# Altium PCB main_old.PcbDoc (part 9 of 15)
Units mil, origin at the board's own origin, x right, y up, seen from the top; angles counter-clockwise.
Board outline 8394.55 x 5164.44 mil, 7 copper layers (Top Layer 1, Layer 2, Layer 3, Unused, Layer 4_pow, Layer 5_gnd, Bottom 6+gnd), stack 46.112 mil thick; 363 components, 409 nets, 1750 pads, 991 vias.
Unrouted connection lines stored in the file: 1.
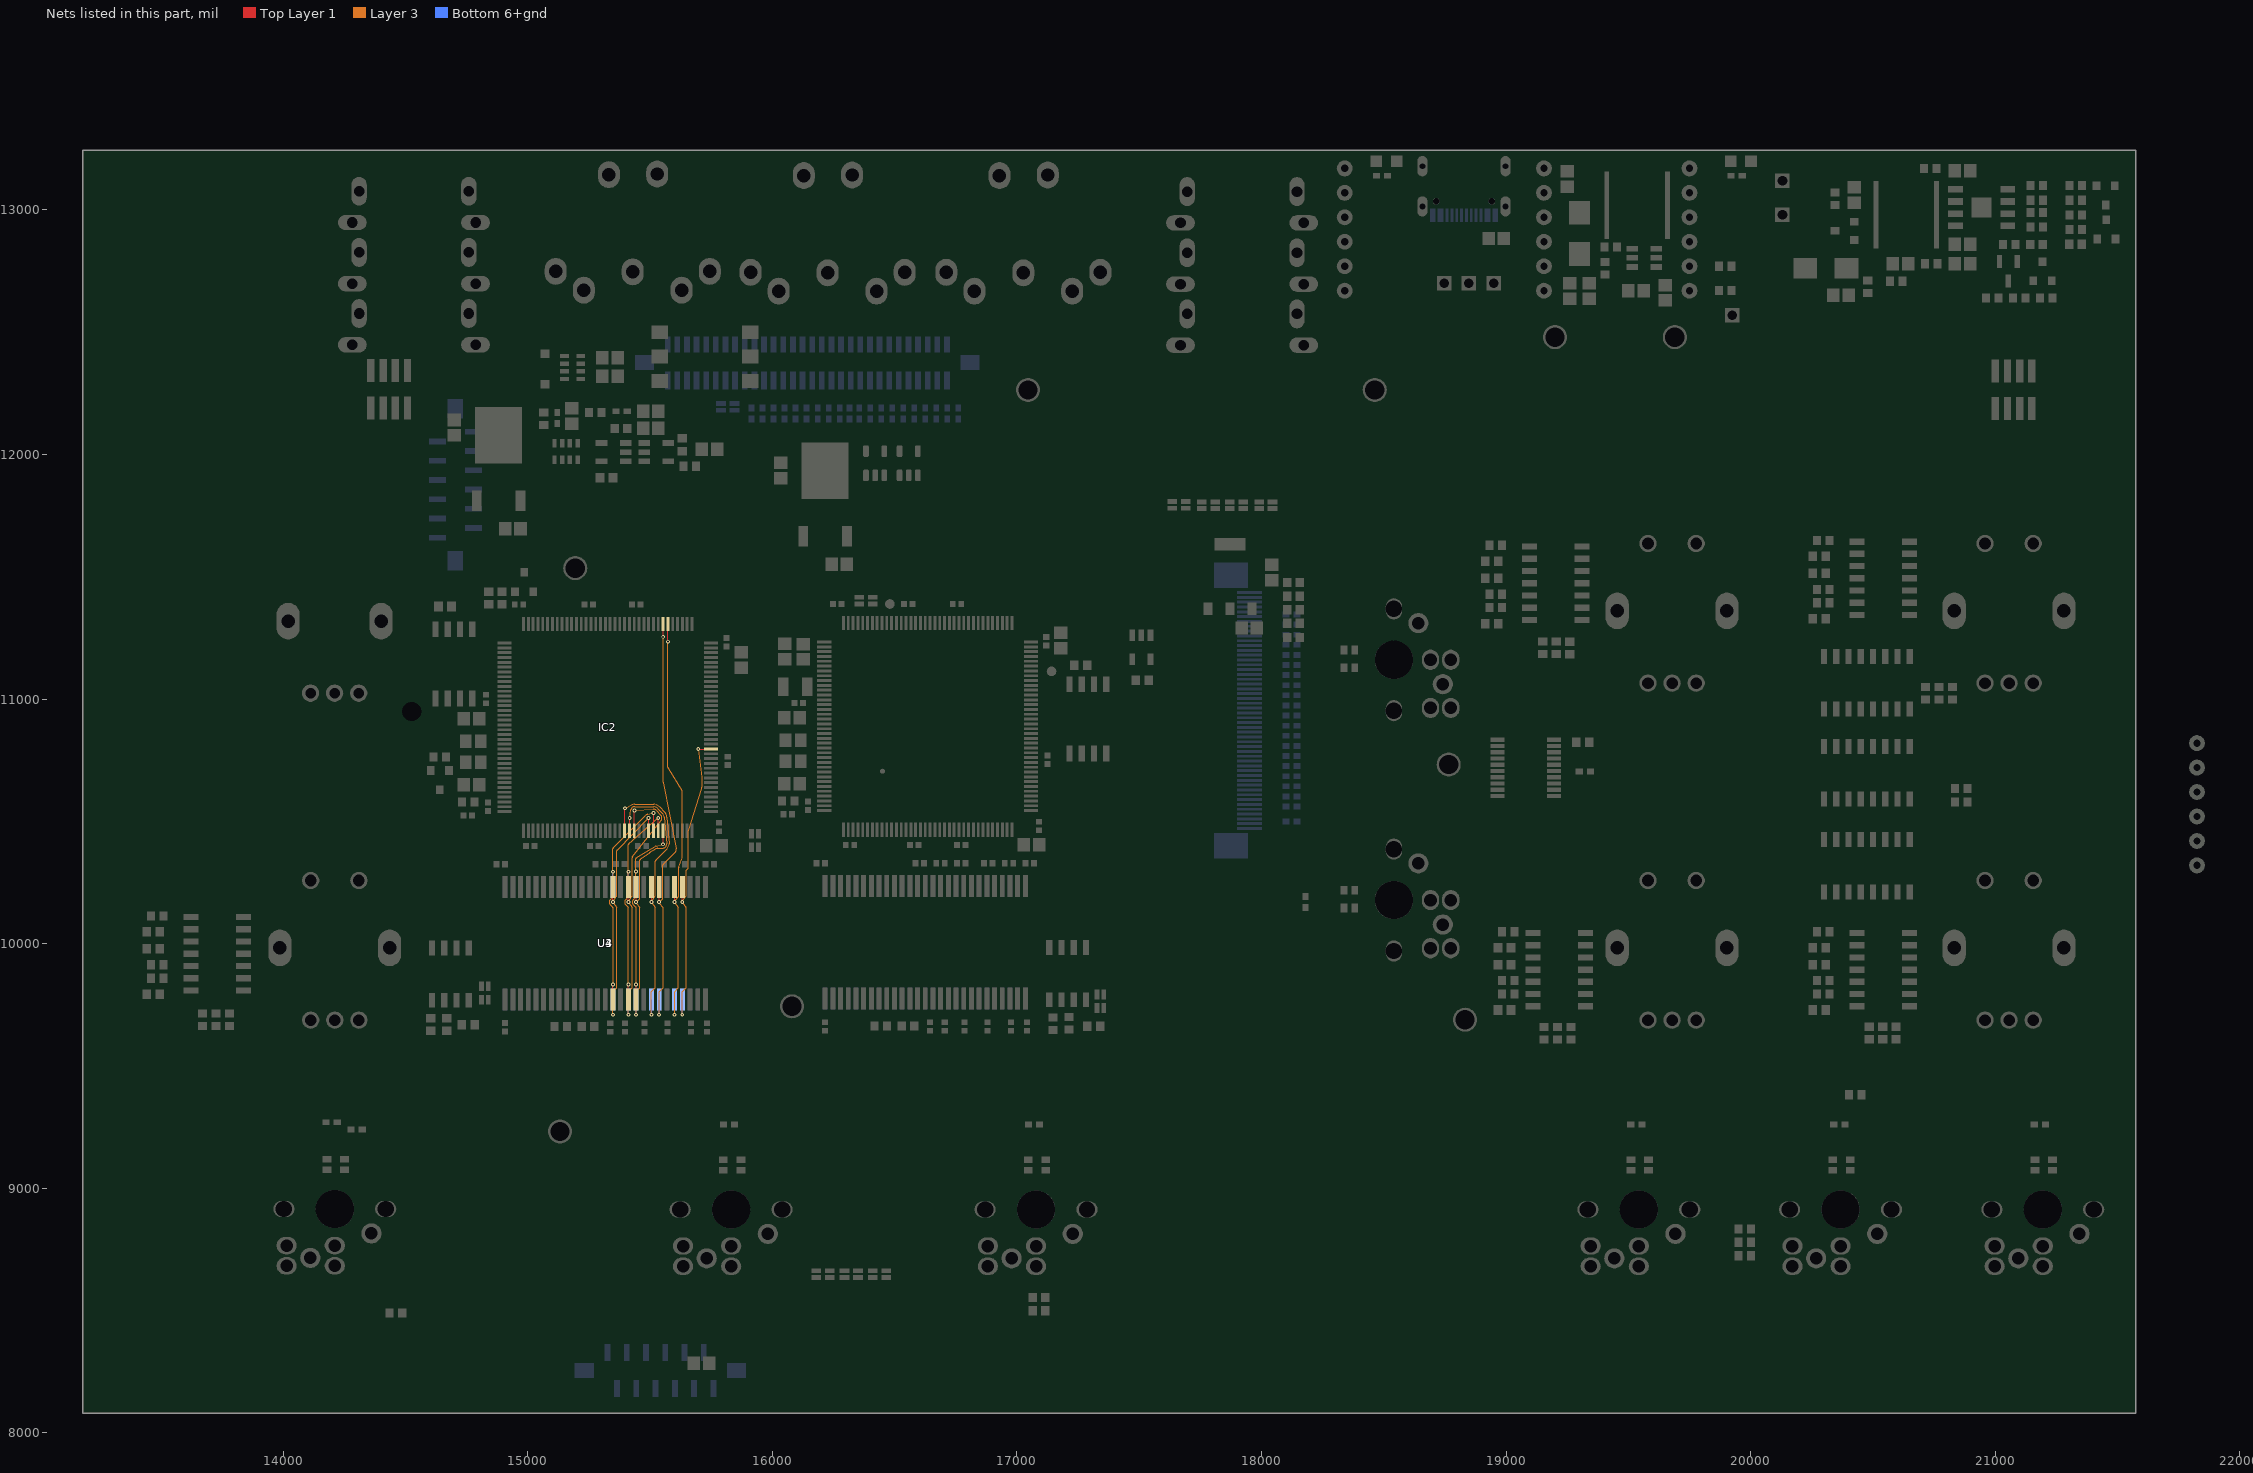
[diagram p12: the nets of this part, all layers, seen from the top]

## Via types
v1: diameter 15.75, hole 7.87, Top Layer 1 to Bottom 6+gnd, tented both sides, 923 vias
v2: diameter 27.56, hole 11.81, Top Layer 1 to Bottom 6+gnd, 45 vias
v3: diameter 23.62/23.62/23.62/23.62/23.62/23.62/23.62 (per signal layer), hole 12, Top Layer 1 to Bottom 6+gnd, tented top, 10 vias
v4: diameter 15.75, hole 7.87, Top Layer 1 to Bottom 6+gnd, 10 vias
v5: diameter 23.62/23.62/23.62/23.62/23.62/23.62/23.62 (per signal layer), hole 12, Top Layer 1 to Bottom 6+gnd, tented bottom, 3 vias

## Nets (pads, with @x,y where several pads share a name; then routed paths per layer and width w, separated by ;. In a path a pad name is that pad's centre, name@x,y a point inside that pad or via, vN(x,y) a via of type N, cw(c..) or ccw(c..) an arc to the next point about the centre after c; other vN are vias at no path point) (continued)
DD1: IC2.86 U3.4 U4.4 | length 1485.1
  Top Layer 1 w5: v1@15631.66,10170.19 U3.4@15631.66,10232.03 ; v1@15697.01,10795.89 IC2.86@15749.3,10795.89
  Layer 3 w5: v1(15631.42,9709.31) 15631.42,9803 15647.54,9819.12 15647.54,10145.78 ; v1(15631.42,10169.94) ccw(c15636.42,10169.94) 15632.47,10166.88 15646.49,10148.8 ; v1@15632.26,10172.73 ccw(c15636.42,10169.94) v1(15631.42,10169.94) ; 15647.54,10197.05 15647.54,10300.48 15655.24,10308.18 ; v1(15696.78,10795.65) 15710.27,10680.61 cw(c15695,10678.82) 15710.36,10679.49 15712.14,10638.84 cw(c15696.78,10638.17) 15711.42,10633.47 15656.96,10463.98 ccw(c15661.73,10462.47) 15656.73,10462.5 15656.67,10311.69 ; v1(15631.42,10169.94) cw(c15636.42,10169.94) v1@15632.26,10172.72 ; v1(15631.42,10169.94) cw(c15636.42,10169.94) v1@15632.26,10172.72 ; v1(15631.42,10169.94) cw(c15636.42,10169.94) v1@15632.26,10172.72 ; v1(15631.42,10169.94) cw(c15636.42,10169.94) v1@15632.26,10172.72 ; v1(15631.42,10169.94) cw(c15636.42,10169.94) v1@15632.26,10172.72 ; v1(15631.42,10169.94) cw(c15636.42,10169.94) v1@15632.26,10172.72 ; v1(15631.42,10169.94) cw(c15636.42,10169.94) v1@15632.26,10172.72 ; v1(15631.42,10169.94) cw(c15636.42,10169.94) v1@15632.26,10172.72 ; v1(15631.42,10169.94) cw(c15636.42,10169.94) v1@15632.26,10172.72 ; v1(15631.42,10169.94) cw(c15636.42,10169.94) v1@15632.26,10172.72 ; v1(15631.42,10169.94) cw(c15636.42,10169.94) v1@15632.26,10172.72 ; v1(15631.42,10169.94) cw(c15636.42,10169.94) v1@15632.26,10172.72 ; v1(15631.42,10169.94) cw(c15636.42,10169.94) v1@15632.26,10172.72 ; v1(15631.42,10169.94) cw(c15636.42,10169.94) v1@15632.26,10172.72 ; v1(15631.42,10169.94) cw(c15636.42,10169.94) v1@15632.26,10172.72 ; v1@15632.26,10172.72 15646.7,10194.31 ; 15646.49,10148.8 cw(c15642.54,10145.74) 15647.54,10145.83 ; 15646.49,10148.8 cw(c15642.54,10145.74) 15647.54,10145.83 ; 15646.49,10148.8 cw(c15642.54,10145.74) 15647.54,10145.83 ; 15646.49,10148.8 cw(c15642.54,10145.74) 15647.54,10145.83 ; 15646.49,10148.8 cw(c15642.54,10145.74) 15647.54,10145.83 ; 15646.49,10148.8 cw(c15642.54,10145.74) 15647.54,10145.83 ; 15646.49,10148.8 cw(c15642.54,10145.74) 15647.54,10145.83 ; 15646.49,10148.8 cw(c15642.54,10145.74) 15647.54,10145.83 ; 15646.49,10148.8 cw(c15642.54,10145.74) 15647.54,10145.83 ; 15646.49,10148.8 cw(c15642.54,10145.74) 15647.54,10145.83 ; 15646.49,10148.8 cw(c15642.54,10145.74) 15647.54,10145.83 ; 15646.49,10148.8 cw(c15642.54,10145.74) 15647.54,10145.83 ; 15646.49,10148.8 cw(c15642.54,10145.74) 15647.54,10145.83 ; 15646.49,10148.8 cw(c15642.54,10145.74) 15647.54,10145.83 ; 15646.49,10148.8 cw(c15642.54,10145.74) 15647.54,10145.83 ; 15646.49,10148.8 cw(c15642.54,10145.74) 15647.54,10145.83 ; 15646.7,10194.32 ccw(c15642.54,10197.09) 15647.54,10197 ; 15646.7,10194.32 ccw(c15642.54,10197.09) 15647.54,10197 ; 15646.7,10194.32 ccw(c15642.54,10197.09) 15647.54,10197 ; 15646.7,10194.32 ccw(c15642.54,10197.09) 15647.54,10197 ; 15646.7,10194.32 ccw(c15642.54,10197.09) 15647.54,10197 ; 15646.7,10194.31 ccw(c15642.54,10197.09) 15647.54,10197 ; 15646.7,10194.32 ccw(c15642.54,10197.09) 15647.54,10197 ; 15646.7,10194.32 ccw(c15642.54,10197.09) 15647.54,10197 ; 15646.7,10194.32 ccw(c15642.54,10197.09) 15647.54,10197 ; 15646.7,10194.32 ccw(c15642.54,10197.09) 15647.54,10197 ; 15646.7,10194.32 ccw(c15642.54,10197.09) 15647.54,10197 ; 15646.7,10194.32 ccw(c15642.54,10197.09) 15647.54,10197 ; 15646.7,10194.32 ccw(c15642.54,10197.09) 15647.54,10197 ; 15646.7,10194.32 ccw(c15642.54,10197.09) 15647.54,10197 ; 15646.7,10194.32 ccw(c15642.54,10197.09) 15647.54,10197 ; 15646.7,10194.32 ccw(c15642.54,10197.09) 15647.54,10197 ; 15655.26,10308.2 ccw(c15651.67,10311.69) 15656.67,10311.69 ; 15655.26,10308.2 ccw(c15651.67,10311.69) 15656.67,10311.69 ; 15655.26,10308.2 ccw(c15651.67,10311.69) 15656.67,10311.69 ; 15655.26,10308.2 ccw(c15651.67,10311.69) 15656.67,10311.69 ; 15655.26,10308.2 ccw(c15651.67,10311.69) 15656.67,10311.69 ; 15655.26,10308.2 ccw(c15651.67,10311.69) 15656.67,10311.69 ; 15655.26,10308.2 ccw(c15651.67,10311.69) 15656.67,10311.69 ; 15655.26,10308.2 ccw(c15651.67,10311.69) 15656.67,10311.69 ; 15655.26,10308.2 ccw(c15651.67,10311.69) 15656.67,10311.69 ; 15655.26,10308.2 ccw(c15651.67,10311.69) 15656.67,10311.69 ; 15655.26,10308.2 ccw(c15651.67,10311.69) 15656.67,10311.69 ; 15655.26,10308.2 ccw(c15651.67,10311.69) 15656.67,10311.69 ; 15655.26,10308.2 ccw(c15651.67,10311.69) 15656.67,10311.69 ; 15655.26,10308.2 ccw(c15651.67,10311.69) 15656.67,10311.69 ; 15655.26,10308.2 ccw(c15651.67,10311.69) 15656.67,10311.69 ; 15655.26,10308.2 ccw(c15651.67,10311.69) 15656.67,10311.69
  Bottom 6+gnd w5: v1@15631.66,9709.56 U4.4@15631.66,9771.4
DD2: IC2.114 U3.5 U4.5 | length 2000.5
  Top Layer 1 w5: v1@15572.76,11234.79 IC2.114@15572.82,11307.38 ; v1@15600.16,10170.19 U3.5@15600.16,10232.03
  Layer 3 w5: v1(15572.84,11234.71) 15572.84,10720.56 ccw(c15577.84,10720.56) 15573.6,10717.91 15629.72,10627.81 15629.76,10627.75 cw(c15616.7,10619.63) 15632.07,10619.63 15632.07,10354.63 ; v1(15599.92,9709.31) 15599.92,9803 15616.04,9819.12 15616.04,10145.78 ; v1(15599.92,10169.94) ccw(c15604.92,10169.94) 15600.97,10166.88 15614.99,10148.8 ; v1(15599.92,10169.94) cw(c15604.92,10169.94) 15601.01,10173.06 15615.45,10191.26 ; 15614.99,10148.8 cw(c15611.04,10145.74) 15616.04,10145.83 ; 15614.99,10148.8 cw(c15611.04,10145.74) 15616.04,10145.83 ; 15614.99,10148.8 cw(c15611.04,10145.74) 15616.04,10145.83 ; 15614.99,10148.8 cw(c15611.04,10145.74) 15616.04,10145.83 ; 15614.99,10148.8 cw(c15611.04,10145.74) 15616.04,10145.83 ; 15614.99,10148.8 cw(c15611.04,10145.74) 15616.04,10145.83 ; 15614.99,10148.8 cw(c15611.04,10145.74) 15616.04,10145.83 ; 15614.99,10148.8 cw(c15611.04,10145.74) 15616.04,10145.83 ; 15614.99,10148.8 cw(c15611.04,10145.74) 15616.04,10145.83 ; 15614.99,10148.8 cw(c15611.04,10145.74) 15616.04,10145.83 ; 15614.99,10148.8 cw(c15611.04,10145.74) 15616.04,10145.83 ; 15614.99,10148.8 cw(c15611.04,10145.74) 15616.04,10145.83 ; 15614.99,10148.8 cw(c15611.04,10145.74) 15616.04,10145.83 ; 15614.99,10148.8 cw(c15611.04,10145.74) 15616.04,10145.83 ; 15614.99,10148.8 cw(c15611.04,10145.74) 15616.04,10145.83 ; 15614.99,10148.8 cw(c15611.04,10145.74) 15616.04,10145.83 ; 15615.45,10191.26 ccw(c15611.53,10194.37) 15616.53,10194.28 ; 15615.45,10191.26 ccw(c15611.53,10194.37) 15616.53,10194.28 ; 15615.45,10191.26 ccw(c15611.53,10194.37) 15616.53,10194.28 ; 15615.45,10191.26 ccw(c15611.53,10194.37) 15616.53,10194.28 ; 15615.45,10191.26 ccw(c15611.53,10194.37) 15616.53,10194.28 ; 15615.45,10191.26 ccw(c15611.53,10194.37) 15616.53,10194.28 ; 15615.45,10191.26 ccw(c15611.53,10194.37) 15616.53,10194.28 ; 15615.45,10191.26 ccw(c15611.53,10194.37) 15616.53,10194.28 ; 15615.45,10191.26 ccw(c15611.53,10194.37) 15616.53,10194.28 ; 15615.45,10191.26 ccw(c15611.53,10194.37) 15616.53,10194.28 ; 15615.45,10191.26 ccw(c15611.53,10194.37) 15616.53,10194.28 ; 15615.45,10191.26 ccw(c15611.53,10194.37) 15616.53,10194.28 ; 15615.45,10191.26 ccw(c15611.53,10194.37) 15616.53,10194.28 ; 15615.45,10191.26 ccw(c15611.53,10194.37) 15616.53,10194.28 ; 15615.45,10191.26 ccw(c15611.53,10194.37) 15616.53,10194.28 ; 15615.45,10191.26 ccw(c15611.53,10194.37) 15616.53,10194.28 ; 15616.53,10194.32 15616.53,10309.9 cw(c15621.53,10309.91) 15616.89,10311.76 15630.26,10345.21 ; 15630.26,10345.21 ccw(c15606.7,10354.63) 15632.07,10354.63 ; 15630.26,10345.21 ccw(c15606.7,10354.63) 15632.07,10354.63 ; 15630.26,10345.21 ccw(c15606.7,10354.63) 15632.07,10354.63 ; 15630.26,10345.21 ccw(c15606.7,10354.63) 15632.07,10354.63 ; 15630.26,10345.21 ccw(c15606.7,10354.63) 15632.07,10354.63 ; 15630.26,10345.21 ccw(c15606.7,10354.63) 15632.07,10354.63 ; 15630.26,10345.21 ccw(c15606.7,10354.63) 15632.07,10354.63 ; 15630.26,10345.21 ccw(c15606.7,10354.63) 15632.07,10354.63 ; 15630.26,10345.21 ccw(c15606.7,10354.63) 15632.07,10354.63 ; 15630.26,10345.21 ccw(c15606.7,10354.63) 15632.07,10354.63 ; 15630.26,10345.21 ccw(c15606.7,10354.63) 15632.07,10354.63 ; 15630.26,10345.21 ccw(c15606.7,10354.63) 15632.07,10354.63 ; 15630.26,10345.21 ccw(c15606.7,10354.63) 15632.07,10354.63 ; 15630.26,10345.21 ccw(c15606.7,10354.63) 15632.07,10354.63 ; 15630.26,10345.21 ccw(c15606.7,10354.63) 15632.07,10354.63 ; 15630.26,10345.21 ccw(c15606.7,10354.63) 15632.07,10354.63
  Bottom 6+gnd w5: v1@15600.16,9709.56 U4.5@15600.16,9771.4
DD3: IC2.115 U3.7 U4.7 | length 1873.2
  Top Layer 1 w5: v1@15537.17,10170.19 U3.7@15537.17,10232.03 ; v1@15553.24,11254.94 IC2.115@15553.24,11307.23
  Layer 3 w5: v1(15536.93,9709.31) 15536.93,9803 15553.05,9819.12 15553.05,10145.78 ; 15552.55,10187.59 cw(c15547.55,10187.68) 15551.09,10184.15 v1(15536.93,10169.94) v1@15536.93,10167.87 ; 15552.55,10187.64 15552.55,10320.48 cw(c15557.55,10320.49) 15553.97,10323.97 15602.7,10373.89 ccw(c15591.7,10384.63) 15606.78,10387.61 15553.57,10658.97 cw(c15558.47,10659.93) 15553.47,10659.93 v1(15553.47,11254.71) ; v1@15536.93,10167.87 ccw(c15541.93,10167.88) v1@15538.17,10164.58 ; v1@15536.93,10167.87 ccw(c15541.93,10167.88) v1@15538.17,10164.58 ; v1@15536.93,10167.87 ccw(c15541.93,10167.88) v1@15538.17,10164.58 ; v1@15536.93,10167.87 ccw(c15541.93,10167.88) v1@15538.17,10164.58 ; v1@15536.93,10167.87 ccw(c15541.93,10167.88) v1@15538.17,10164.58 ; v1@15536.93,10167.87 ccw(c15541.93,10167.88) v1@15538.17,10164.58 ; v1@15536.93,10167.87 ccw(c15541.93,10167.88) v1@15538.17,10164.58 ; v1@15536.93,10167.87 ccw(c15541.93,10167.88) v1@15538.17,10164.58 ; v1@15536.93,10167.87 ccw(c15541.93,10167.88) v1@15538.17,10164.58 ; v1@15536.93,10167.87 ccw(c15541.93,10167.88) v1@15538.17,10164.58 ; v1@15536.93,10167.87 ccw(c15541.93,10167.88) v1@15538.17,10164.58 ; v1@15536.93,10167.87 ccw(c15541.93,10167.88) v1@15538.17,10164.58 ; v1@15536.93,10167.87 ccw(c15541.93,10167.88) v1@15538.17,10164.58 ; v1@15536.93,10167.87 ccw(c15541.93,10167.88) v1@15538.17,10164.58 ; v1@15536.93,10167.87 ccw(c15541.93,10167.88) v1@15538.17,10164.58 ; v1@15536.93,10167.87 ccw(c15541.93,10167.88) v1@15538.17,10164.58 ; v1@15538.17,10164.58 15551.81,10149.04 ; 15551.81,10149.04 cw(c15548.05,10145.74) 15553.05,10145.83 ; 15551.81,10149.04 cw(c15548.05,10145.74) 15553.05,10145.83 ; 15551.81,10149.04 cw(c15548.05,10145.74) 15553.05,10145.83 ; 15551.81,10149.04 cw(c15548.05,10145.74) 15553.05,10145.83 ; 15551.81,10149.04 cw(c15548.05,10145.74) 15553.05,10145.83 ; 15551.81,10149.04 cw(c15548.05,10145.74) 15553.05,10145.83 ; 15551.81,10149.04 cw(c15548.05,10145.74) 15553.05,10145.83 ; 15551.81,10149.04 cw(c15548.05,10145.74) 15553.05,10145.83 ; 15551.81,10149.04 cw(c15548.05,10145.74) 15553.05,10145.83 ; 15551.81,10149.04 cw(c15548.05,10145.74) 15553.05,10145.83 ; 15551.81,10149.04 cw(c15548.05,10145.74) 15553.05,10145.83 ; 15551.81,10149.04 cw(c15548.05,10145.74) 15553.05,10145.83 ; 15551.81,10149.04 cw(c15548.05,10145.74) 15553.05,10145.83 ; 15551.81,10149.04 cw(c15548.05,10145.74) 15553.05,10145.83 ; 15551.81,10149.04 cw(c15548.05,10145.74) 15553.05,10145.83 ; 15551.81,10149.04 cw(c15548.05,10145.74) 15553.05,10145.83
  Bottom 6+gnd w5: v1@15537.17,9709.56 U4.7@15537.17,9771.4
DD4: IC2.58 U3.8 U4.8 | length 2377.5
  Top Layer 1 w5: IC2.58@15395.76,10461.71 15396.15,10462.11 15396.15,10552.4 v1(15397.57,10553.82) ; v1@15505.68,10170.19 U3.8@15505.68,10232.03
  Layer 3 w5: v1(15397.57,10553.82) 15425.61,10567.45 ; v1(15505.43,9709.31) 15505.43,9803 15521.55,9819.12 15521.55,10145.78 ; 15521.8,10198.16 15521.8,10337.31 ; 15425.61,10567.45 cw(c15436.7,10544.63) 15436.78,10570 ; 15425.61,10567.45 cw(c15436.7,10544.63) 15436.78,10570 ; 15425.61,10567.45 cw(c15436.7,10544.63) 15436.78,10570 ; 15425.61,10567.45 cw(c15436.7,10544.63) 15436.78,10570 ; 15425.61,10567.45 cw(c15436.7,10544.63) 15436.78,10570 ; 15425.61,10567.45 cw(c15436.7,10544.63) 15436.78,10570 ; 15425.61,10567.45 cw(c15436.7,10544.63) 15436.78,10570 ; 15425.61,10567.45 cw(c15436.7,10544.63) 15436.78,10570 ; 15425.61,10567.45 cw(c15436.7,10544.63) 15436.78,10570 ; 15425.61,10567.45 cw(c15436.7,10544.63) 15436.78,10570 ; 15425.61,10567.45 cw(c15436.7,10544.63) 15436.78,10570 ; 15425.61,10567.45 cw(c15436.7,10544.63) 15436.78,10570 ; 15425.61,10567.45 cw(c15436.7,10544.63) 15436.78,10570 ; 15425.61,10567.45 cw(c15436.7,10544.63) 15436.78,10570 ; 15425.61,10567.45 cw(c15436.7,10544.63) 15436.78,10570 ; 15425.61,10567.45 cw(c15436.7,10544.63) 15436.78,10570 ; 15436.78,10570 15513.87,10569.77 ; 15513.87,10569.77 cw(c15513.79,10534.39) 15539.21,10558.99 ; 15513.87,10569.77 cw(c15513.79,10534.39) 15539.21,10558.99 ; 15513.87,10569.77 cw(c15513.79,10534.39) 15539.21,10558.99 ; 15513.87,10569.77 cw(c15513.79,10534.39) 15539.21,10558.99 ; 15513.87,10569.77 cw(c15513.79,10534.39) 15539.21,10558.99 ; 15513.87,10569.77 cw(c15513.79,10534.39) 15539.21,10558.99 ; 15513.87,10569.77 cw(c15513.79,10534.39) 15539.21,10558.99 ; 15513.87,10569.77 cw(c15513.79,10534.39) 15539.21,10558.99 ; 15513.87,10569.77 cw(c15513.79,10534.39) 15539.21,10558.99 ; 15513.87,10569.77 cw(c15513.79,10534.39) 15539.21,10558.99 ; 15513.87,10569.77 cw(c15513.79,10534.39) 15539.21,10558.99 ; 15513.87,10569.77 cw(c15513.79,10534.39) 15539.21,10558.99 ; 15513.87,10569.77 cw(c15513.79,10534.39) 15539.21,10558.99 ; 15513.87,10569.77 cw(c15513.79,10534.39) 15539.21,10558.99 ; 15513.87,10569.77 cw(c15513.79,10534.39) 15539.21,10558.99 ; 15513.87,10569.77 cw(c15513.79,10534.39) 15539.21,10558.99 ; 15520.5,10148.8 cw(c15516.55,10145.74) 15521.55,10145.83 ; 15520.5,10148.8 cw(c15516.55,10145.74) 15521.55,10145.83 ; 15520.5,10148.8 cw(c15516.55,10145.74) 15521.55,10145.83 ; 15520.5,10148.8 cw(c15516.55,10145.74) 15521.55,10145.83 ; 15520.5,10148.8 cw(c15516.55,10145.74) 15521.55,10145.83 ; 15520.5,10148.8 cw(c15516.55,10145.74) 15521.55,10145.83 ; 15520.5,10148.8 cw(c15516.55,10145.74) 15521.55,10145.83 ; 15520.5,10148.8 cw(c15516.55,10145.74) 15521.55,10145.83 ; 15520.5,10148.8 cw(c15516.55,10145.74) 15521.55,10145.83 ; 15520.5,10148.8 cw(c15516.55,10145.74) 15521.55,10145.83 ; 15520.5,10148.8 cw(c15516.55,10145.74) 15521.55,10145.83 ; 15520.5,10148.8 cw(c15516.55,10145.74) 15521.55,10145.83 ; 15520.5,10148.8 cw(c15516.55,10145.74) 15521.55,10145.83 ; 15520.5,10148.8 cw(c15516.55,10145.74) 15521.55,10145.83 ; 15520.5,10148.8 cw(c15516.55,10145.74) 15521.55,10145.83 ; 15520.5,10148.8 cw(c15516.55,10145.74) 15521.55,10145.83 ; 15520.5,10148.8 15506.49,10166.87 cw(c15510.43,10169.94) v1(15505.43,10169.94) 15505.43,10170 cw(c15510.43,10169.94) 15506.23,10172.66 15521,10195.49 ; 15521,10195.49 ccw(c15516.8,10198.21) 15521.8,10198.12 ; 15521,10195.49 ccw(c15516.8,10198.21) 15521.8,10198.12 ; 15521,10195.49 ccw(c15516.8,10198.21) 15521.8,10198.12 ; 15521,10195.49 ccw(c15516.8,10198.21) 15521.8,10198.12 ; 15521,10195.49 ccw(c15516.8,10198.21) 15521.8,10198.12 ; 15521,10195.49 ccw(c15516.8,10198.21) 15521.8,10198.12 ; 15521,10195.49 ccw(c15516.8,10198.21) 15521.8,10198.12 ; 15521,10195.49 ccw(c15516.8,10198.21) 15521.8,10198.12 ; 15521,10195.49 ccw(c15516.8,10198.21) 15521.8,10198.12 ; 15521,10195.49 ccw(c15516.8,10198.21) 15521.8,10198.12 ; 15521,10195.49 ccw(c15516.8,10198.21) 15521.8,10198.12 ; 15521,10195.49 ccw(c15516.8,10198.21) 15521.8,10198.12 ; 15521,10195.49 ccw(c15516.8,10198.21) 15521.8,10198.12 ; 15521,10195.49 ccw(c15516.8,10198.21) 15521.8,10198.12 ; 15521,10195.49 ccw(c15516.8,10198.21) 15521.8,10198.12 ; 15521,10195.49 ccw(c15516.8,10198.21) 15521.8,10198.12 ; 15521.8,10337.31 cw(c15526.8,10337.31) 15523.25,10340.82 ; 15521.8,10337.31 cw(c15526.8,10337.31) 15523.25,10340.82 ; 15521.8,10337.31 cw(c15526.8,10337.31) 15523.25,10340.82 ; 15521.8,10337.31 cw(c15526.8,10337.31) 15523.25,10340.82 ; 15521.8,10337.31 cw(c15526.8,10337.31) 15523.25,10340.82 ; 15521.8,10337.31 cw(c15526.8,10337.31) 15523.25,10340.82 ; 15521.8,10337.31 cw(c15526.8,10337.31) 15523.25,10340.82 ; 15521.8,10337.31 cw(c15526.8,10337.31) 15523.25,10340.82 ; 15521.8,10337.31 cw(c15526.8,10337.31) 15523.25,10340.82 ; 15521.8,10337.31 cw(c15526.8,10337.31) 15523.25,10340.82 ; 15521.8,10337.31 cw(c15526.8,10337.31) 15523.25,10340.82 ; 15521.8,10337.31 cw(c15526.8,10337.31) 15523.25,10340.82 ; 15521.8,10337.31 cw(c15526.8,10337.31) 15523.25,10340.82 ; 15521.8,10337.31 cw(c15526.8,10337.31) 15523.25,10340.82 ; 15521.8,10337.31 cw(c15526.8,10337.31) 15523.25,10340.82 ; 15521.8,10337.31 cw(c15526.8,10337.31) 15523.25,10340.82 ; 15523.25,10340.82 15524.83,10342.4 ; 15524.83,10342.4 ccw(c15506.85,10360.32) 15524.96,10342.53 ; 15524.83,10342.4 ccw(c15506.85,10360.32) 15524.96,10342.53 ; 15524.83,10342.4 ccw(c15506.85,10360.32) 15524.96,10342.53 ; 15524.83,10342.4 ccw(c15506.85,10360.32) 15524.96,10342.53 ; 15524.83,10342.4 ccw(c15506.85,10360.32) 15524.96,10342.53 ; 15524.83,10342.4 ccw(c15506.85,10360.32) 15524.96,10342.53 ; 15524.83,10342.4 ccw(c15506.85,10360.32) 15524.96,10342.53 ; 15524.83,10342.4 ccw(c15506.85,10360.32) 15524.96,10342.53 ; 15524.83,10342.4 ccw(c15506.85,10360.32) 15524.96,10342.53 ; 15524.83,10342.4 ccw(c15506.85,10360.32) 15524.96,10342.53 ; 15524.83,10342.4 ccw(c15506.85,10360.32) 15524.96,10342.53 ; 15524.83,10342.4 ccw(c15506.85,10360.32) 15524.96,10342.53 ; 15524.83,10342.4 ccw(c15506.85,10360.32) 15524.96,10342.53 ; 15524.83,10342.4 ccw(c15506.85,10360.32) 15524.96,10342.53 ; 15524.83,10342.4 ccw(c15506.85,10360.32) 15524.96,10342.53 ; 15524.83,10342.4 ccw(c15506.85,10360.32) 15524.96,10342.53 ; 15524.96,10342.53 15570.16,10388.55 ccw(c15552.06,10406.33) 15577.35,10408.4 15568.41,10517.28 ; 15539.21,10558.99 15558.53,10539.04 ; 15558.53,10539.04 cw(c15533.16,10514.39) 15568.41,10517.29 ; 15558.53,10539.04 cw(c15533.16,10514.39) 15568.41,10517.29 ; 15558.53,10539.04 cw(c15533.16,10514.39) 15568.41,10517.29 ; 15558.53,10539.04 cw(c15533.16,10514.39) 15568.41,10517.29 ; 15558.53,10539.04 cw(c15533.16,10514.39) 15568.41,10517.29 ; 15558.53,10539.04 cw(c15533.16,10514.39) 15568.41,10517.29 ; 15558.53,10539.04 cw(c15533.16,10514.39) 15568.41,10517.29 ; 15558.53,10539.04 cw(c15533.16,10514.39) 15568.41,10517.29 ; 15558.53,10539.04 cw(c15533.16,10514.39) 15568.41,10517.29 ; 15558.53,10539.04 cw(c15533.16,10514.39) 15568.41,10517.29 ; 15558.53,10539.04 cw(c15533.16,10514.39) 15568.41,10517.29 ; 15558.53,10539.04 cw(c15533.16,10514.39) 15568.41,10517.29 ; 15558.53,10539.04 cw(c15533.16,10514.39) 15568.41,10517.29 ; 15558.53,10539.04 cw(c15533.16,10514.39) 15568.41,10517.29 ; 15558.53,10539.04 cw(c15533.16,10514.39) 15568.41,10517.29 ; 15558.53,10539.04 cw(c15533.16,10514.39) 15568.41,10517.29
  Bottom 6+gnd w5: v1@15505.68,9709.56 U4.8@15505.68,9771.4
DD5: IC2.59 U3.10 U4.10 | length 2188.2
  Top Layer 1 w5: IC2.59@15415.34,10461.87 15415.85,10462.44 15415.85,10513.82 v1(15416.42,10514.39) ; v1@15442.68,10170.19 U3.10@15442.68,10232.03
  Layer 3 w5: v1(15416.42,10514.39) 15421.51,10547 cw(c15436.7,10544.63) 15436.75,10560 15513.86,10559.77 ; v1(15442.44,9709.31) 15442.44,9803 15458.56,9819.12 15458.56,10145.78 ; v1@15442.44,10167.87 ccw(c15447.44,10167.88) v1@15443.68,10164.58 ; v1@15442.44,10167.87 ccw(c15447.44,10167.88) v1@15443.68,10164.58 ; v1@15442.44,10167.87 ccw(c15447.44,10167.88) v1@15443.68,10164.58 ; v1@15442.44,10167.87 ccw(c15447.44,10167.88) v1@15443.68,10164.58 ; v1@15442.44,10167.87 ccw(c15447.44,10167.88) v1@15443.68,10164.58 ; v1@15442.44,10167.87 ccw(c15447.44,10167.88) v1@15443.68,10164.58 ; v1@15442.44,10167.87 ccw(c15447.44,10167.88) v1@15443.68,10164.58 ; v1@15442.44,10167.87 ccw(c15447.44,10167.88) v1@15443.68,10164.58 ; v1@15442.44,10167.87 ccw(c15447.44,10167.88) v1@15443.68,10164.58 ; v1@15442.44,10167.87 ccw(c15447.44,10167.88) v1@15443.68,10164.58 ; v1@15442.44,10167.87 ccw(c15447.44,10167.88) v1@15443.68,10164.58 ; v1@15442.44,10167.87 ccw(c15447.44,10167.88) v1@15443.68,10164.58 ; v1@15442.44,10167.87 ccw(c15447.44,10167.88) v1@15443.68,10164.58 ; v1@15442.44,10167.87 ccw(c15447.44,10167.88) v1@15443.68,10164.58 ; v1@15442.44,10167.87 ccw(c15447.44,10167.88) v1@15443.68,10164.58 ; v1@15442.44,10167.87 ccw(c15447.44,10167.88) v1@15443.68,10164.58 ; v1@15442.44,10167.87 v1(15442.44,10169.94) 15456.69,10184.24 ccw(c15453.15,10187.77) 15458.15,10187.68 15458.15,10340.53 cw(c15463.15,10340.53) 15460.15,10344.53 15497.64,10372.62 ; v1@15443.68,10164.58 15457.32,10149.04 ; 15457.32,10149.04 cw(c15453.56,10145.74) 15458.56,10145.83 ; 15457.32,10149.04 cw(c15453.56,10145.74) 15458.56,10145.83 ; 15457.32,10149.04 cw(c15453.56,10145.74) 15458.56,10145.83 ; 15457.32,10149.04 cw(c15453.56,10145.74) 15458.56,10145.83 ; 15457.32,10149.04 cw(c15453.56,10145.74) 15458.56,10145.83 ; 15457.32,10149.04 cw(c15453.56,10145.74) 15458.56,10145.83 ; 15457.32,10149.04 cw(c15453.56,10145.74) 15458.56,10145.83 ; 15457.32,10149.04 cw(c15453.56,10145.74) 15458.56,10145.83 ; 15457.32,10149.04 cw(c15453.56,10145.74) 15458.56,10145.83 ; 15457.32,10149.04 cw(c15453.56,10145.74) 15458.56,10145.83 ; 15457.32,10149.04 cw(c15453.56,10145.74) 15458.56,10145.83 ; 15457.32,10149.04 cw(c15453.56,10145.74) 15458.56,10145.83 ; 15457.32,10149.04 cw(c15453.56,10145.74) 15458.56,10145.83 ; 15457.32,10149.04 cw(c15453.56,10145.74) 15458.56,10145.83 ; 15457.32,10149.04 cw(c15453.56,10145.74) 15458.56,10145.83 ; 15457.32,10149.04 cw(c15453.56,10145.74) 15458.56,10145.83 ; 15497.64,10372.62 cw(c15506.85,10360.32) 15499.18,10373.64 ; 15497.64,10372.62 cw(c15506.85,10360.32) 15499.18,10373.64 ; 15497.64,10372.62 cw(c15506.85,10360.32) 15499.18,10373.64 ; 15497.64,10372.62 cw(c15506.85,10360.32) 15499.18,10373.64 ; 15497.64,10372.62 cw(c15506.85,10360.32) 15499.18,10373.64 ; 15497.64,10372.62 cw(c15506.85,10360.32) 15499.18,10373.64 ; 15497.64,10372.62 cw(c15506.85,10360.32) 15499.18,10373.64 ; 15497.64,10372.62 cw(c15506.85,10360.32) 15499.18,10373.64 ; 15497.64,10372.62 cw(c15506.85,10360.32) 15499.18,10373.64 ; 15497.64,10372.62 cw(c15506.85,10360.32) 15499.18,10373.64 ; 15497.64,10372.62 cw(c15506.85,10360.32) 15499.18,10373.64 ; 15497.64,10372.62 cw(c15506.85,10360.32) 15499.18,10373.64 ; 15497.64,10372.62 cw(c15506.85,10360.32) 15499.18,10373.64 ; 15497.64,10372.62 cw(c15506.85,10360.32) 15499.18,10373.64 ; 15497.64,10372.62 cw(c15506.85,10360.32) 15499.18,10373.64 ; 15497.64,10372.62 cw(c15506.85,10360.32) 15499.18,10373.64 ; 15499.18,10373.64 15524.03,10387.95 ; 15513.86,10559.77 cw(c15513.79,10534.39) 15532.02,10552.04 ; 15513.86,10559.77 cw(c15513.79,10534.39) 15532.02,10552.04 ; 15513.86,10559.77 cw(c15513.79,10534.39) 15532.02,10552.04 ; 15513.86,10559.77 cw(c15513.79,10534.39) 15532.02,10552.04 ; 15513.86,10559.77 cw(c15513.79,10534.39) 15532.02,10552.04 ; 15513.86,10559.77 cw(c15513.79,10534.39) 15532.02,10552.04 ; 15513.86,10559.77 cw(c15513.79,10534.39) 15532.02,10552.04 ; 15513.86,10559.77 cw(c15513.79,10534.39) 15532.02,10552.04 ; 15513.86,10559.77 cw(c15513.79,10534.39) 15532.02,10552.04 ; 15513.86,10559.77 cw(c15513.79,10534.39) 15532.02,10552.04 ; 15513.86,10559.77 cw(c15513.79,10534.39) 15532.02,10552.04 ; 15513.86,10559.77 cw(c15513.79,10534.39) 15532.02,10552.04 ; 15513.86,10559.77 cw(c15513.79,10534.39) 15532.02,10552.04 ; 15513.86,10559.77 cw(c15513.79,10534.39) 15532.02,10552.04 ; 15513.86,10559.77 cw(c15513.79,10534.39) 15532.02,10552.04 ; 15513.86,10559.77 cw(c15513.79,10534.39) 15532.02,10552.04 ; 15524.03,10387.95 cw(c15531.7,10374.63) 15531,10389.99 ; 15524.03,10387.95 cw(c15531.7,10374.63) 15531,10389.99 ; 15524.03,10387.95 cw(c15531.7,10374.63) 15531,10389.99 ; 15524.03,10387.95 cw(c15531.7,10374.63) 15531,10389.99 ; 15524.03,10387.95 cw(c15531.7,10374.63) 15531,10389.99 ; 15524.03,10387.95 cw(c15531.7,10374.63) 15531,10389.99 ; 15524.03,10387.95 cw(c15531.7,10374.63) 15531,10389.99 ; 15524.03,10387.95 cw(c15531.7,10374.63) 15531,10389.99 ; 15524.03,10387.95 cw(c15531.7,10374.63) 15531,10389.99 ; 15524.03,10387.95 cw(c15531.7,10374.63) 15531,10389.99 ; 15524.03,10387.95 cw(c15531.7,10374.63) 15531,10389.99 ; 15524.03,10387.95 cw(c15531.7,10374.63) 15531,10389.99 ; 15524.03,10387.95 cw(c15531.7,10374.63) 15531,10389.99 ; 15524.03,10387.95 cw(c15531.7,10374.63) 15531,10389.99 ; 15524.03,10387.95 cw(c15531.7,10374.63) 15531,10389.99 ; 15524.03,10387.95 cw(c15531.7,10374.63) 15531,10389.99 ; 15531,10389.99 15552.75,10390.97 ; 15532.02,10552.04 15551.38,10532.04 cw(c15533.16,10514.39) 15558.45,10516.47 15567.38,10407.59 ; 15552.75,10390.97 ccw(c15552.06,10406.33) 15567.38,10407.59 ; 15552.75,10390.97 ccw(c15552.06,10406.33) 15567.38,10407.59 ; 15552.75,10390.97 ccw(c15552.06,10406.33) 15567.38,10407.59 ; 15552.75,10390.97 ccw(c15552.06,10406.33) 15567.38,10407.59 ; 15552.75,10390.97 ccw(c15552.06,10406.33) 15567.38,10407.59 ; 15552.75,10390.97 ccw(c15552.06,10406.33) 15567.38,10407.59 ; 15552.75,10390.97 ccw(c15552.06,10406.33) 15567.38,10407.59 ; 15552.75,10390.97 ccw(c15552.06,10406.33) 15567.38,10407.59 ; 15552.75,10390.97 ccw(c15552.06,10406.33) 15567.38,10407.59 ; 15552.75,10390.97 ccw(c15552.06,10406.33) 15567.38,10407.59 ; 15552.75,10390.97 ccw(c15552.06,10406.33) 15567.38,10407.59 ; 15552.75,10390.97 ccw(c15552.06,10406.33) 15567.38,10407.59 ; 15552.75,10390.97 ccw(c15552.06,10406.33) 15567.38,10407.59 ; 15552.75,10390.97 ccw(c15552.06,10406.33) 15567.38,10407.59 ; 15552.75,10390.97 ccw(c15552.06,10406.33) 15567.38,10407.59 ; 15552.75,10390.97 ccw(c15552.06,10406.33) 15567.38,10407.59
  Bottom 6+gnd w5: v1@15442.68,9709.56 U4.10@15442.68,9771.4
DD6: IC2.60 U3.11 U4.11 | length 1584.3
  Top Layer 1 w5: v1@15411.19,10170.19 U3.11@15411.19,10232.03 ; IC2.60@15435.13,10461.71 15435.83,10462.42 15435.83,10543.76 v1(15436.7,10544.63)
  Layer 3 w5: v1(15410.94,9709.31) 15410.94,9803 15427.06,9819.12 15427.06,10145.78 ; v1(15410.94,10169.94) ccw(c15415.94,10169.94) 15411.99,10166.88 15426.02,10148.8 ; 15426.32,10196.3 15426.32,10352.17 ; v1(15436.7,10544.63) 15512.76,10549.73 ; v1(15410.94,10169.94) cw(c15415.94,10169.94) v1@15411.78,10172.71 ; v1(15410.94,10169.94) cw(c15415.94,10169.94) v1@15411.78,10172.71 ; v1(15410.94,10169.94) cw(c15415.94,10169.94) v1@15411.78,10172.71 ; v1(15410.94,10169.94) cw(c15415.94,10169.94) v1@15411.78,10172.71 ; v1(15410.94,10169.94) cw(c15415.94,10169.94) v1@15411.78,10172.71 ; v1(15410.94,10169.94) cw(c15415.94,10169.94) v1@15411.78,10172.71 ; v1(15410.94,10169.94) cw(c15415.94,10169.94) v1@15411.78,10172.71 ; v1(15410.94,10169.94) cw(c15415.94,10169.94) v1@15411.78,10172.71 ; v1(15410.94,10169.94) cw(c15415.94,10169.94) v1@15411.78,10172.71 ; v1(15410.94,10169.94) cw(c15415.94,10169.94) v1@15411.78,10172.71 ; v1(15410.94,10169.94) cw(c15415.94,10169.94) v1@15411.78,10172.71 ; v1(15410.94,10169.94) cw(c15415.94,10169.94) v1@15411.78,10172.71 ; v1(15410.94,10169.94) cw(c15415.94,10169.94) v1@15411.78,10172.71 ; v1(15410.94,10169.94) cw(c15415.94,10169.94) v1@15411.78,10172.71 ; v1(15410.94,10169.94) cw(c15415.94,10169.94) v1@15411.78,10172.71 ; v1(15410.94,10169.94) cw(c15415.94,10169.94) v1@15411.78,10172.71 ; v1@15411.78,10172.71 15425.5,10193.6 ; 15425.5,10193.6 ccw(c15421.32,10196.34) 15426.32,10196.25 ; 15425.5,10193.6 ccw(c15421.32,10196.34) 15426.32,10196.25 ; 15425.5,10193.6 ccw(c15421.32,10196.34) 15426.32,10196.25 ; 15425.5,10193.6 ccw(c15421.32,10196.34) 15426.32,10196.25 ; 15425.5,10193.61 ccw(c15421.32,10196.34) 15426.32,10196.25 ; 15425.5,10193.61 ccw(c15421.32,10196.34) 15426.32,10196.25 ; 15425.5,10193.61 ccw(c15421.32,10196.34) 15426.32,10196.25 ; 15425.5,10193.61 ccw(c15421.32,10196.34) 15426.32,10196.25 ; 15425.51,10193.61 ccw(c15421.32,10196.34) 15426.32,10196.25 ; 15425.51,10193.61 ccw(c15421.32,10196.34) 15426.32,10196.25 ; 15425.51,10193.61 ccw(c15421.32,10196.34) 15426.32,10196.25 ; 15425.51,10193.61 ccw(c15421.32,10196.34) 15426.32,10196.25 ; 15425.51,10193.61 ccw(c15421.32,10196.34) 15426.32,10196.25 ; 15425.51,10193.61 ccw(c15421.32,10196.34) 15426.32,10196.25 ; 15425.51,10193.61 ccw(c15421.32,10196.34) 15426.32,10196.25 ; 15425.51,10193.61 ccw(c15421.32,10196.34) 15426.32,10196.25 ; 15426.02,10148.8 cw(c15422.06,10145.74) 15427.06,10145.83 ; 15426.02,10148.8 cw(c15422.06,10145.74) 15427.06,10145.83 ; 15426.02,10148.8 cw(c15422.06,10145.74) 15427.06,10145.83 ; 15426.02,10148.8 cw(c15422.06,10145.74) 15427.06,10145.83 ; 15426.02,10148.8 cw(c15422.06,10145.74) 15427.06,10145.83 ; 15426.02,10148.8 cw(c15422.06,10145.74) 15427.06,10145.83 ; 15426.02,10148.8 cw(c15422.06,10145.74) 15427.06,10145.83 ; 15426.02,10148.8 cw(c15422.06,10145.74) 15427.06,10145.83 ; 15426.02,10148.8 cw(c15422.06,10145.74) 15427.06,10145.83 ; 15426.02,10148.8 cw(c15422.06,10145.74) 15427.06,10145.83 ; 15426.02,10148.8 cw(c15422.06,10145.74) 15427.06,10145.83 ; 15426.02,10148.8 cw(c15422.06,10145.74) 15427.06,10145.83 ; 15426.02,10148.8 cw(c15422.06,10145.74) 15427.06,10145.83 ; 15426.02,10148.8 cw(c15422.06,10145.74) 15427.06,10145.83 ; 15426.02,10148.8 cw(c15422.06,10145.74) 15427.06,10145.83 ; 15426.02,10148.8 cw(c15422.06,10145.74) 15427.06,10145.83 ; 15426.32,10352.17 cw(c15431.32,10352.17) 15427.39,10355.27 ; 15426.32,10352.17 cw(c15431.32,10352.17) 15427.39,10355.27 ; 15426.32,10352.17 cw(c15431.32,10352.17) 15427.39,10355.27 ; 15426.32,10352.17 cw(c15431.32,10352.17) 15427.39,10355.27 ; 15426.32,10352.17 cw(c15431.32,10352.17) 15427.39,10355.27 ; 15426.32,10352.17 cw(c15431.32,10352.17) 15427.39,10355.27 ; 15426.32,10352.17 cw(c15431.32,10352.17) 15427.39,10355.27 ; 15426.32,10352.17 cw(c15431.32,10352.17) 15427.39,10355.27 ; 15426.32,10352.17 cw(c15431.32,10352.17) 15427.39,10355.27 ; 15426.32,10352.17 cw(c15431.32,10352.17) 15427.39,10355.27 ; 15426.32,10352.17 cw(c15431.32,10352.17) 15427.39,10355.27 ; 15426.32,10352.17 cw(c15431.32,10352.17) 15427.39,10355.27 ; 15426.32,10352.17 cw(c15431.32,10352.17) 15427.39,10355.27 ; 15426.32,10352.17 cw(c15431.32,10352.17) 15427.39,10355.27 ; 15426.32,10352.17 cw(c15431.32,10352.17) 15427.39,10355.27 ; 15426.32,10352.17 cw(c15431.32,10352.17) 15427.39,10355.27 ; 15427.39,10355.27 15545.23,10504.88 ccw(c15533.16,10514.39) 15544.2,10525.09 15524.83,10545.09 ; 15512.76,10549.73 cw(c15513.79,10534.39) 15524.83,10545.09 ; 15512.76,10549.73 cw(c15513.79,10534.39) 15524.83,10545.09 ; 15512.76,10549.73 cw(c15513.79,10534.39) 15524.83,10545.09 ; 15512.76,10549.73 cw(c15513.79,10534.39) 15524.83,10545.09 ; 15512.76,10549.73 cw(c15513.79,10534.39) 15524.83,10545.09 ; 15512.76,10549.73 cw(c15513.79,10534.39) 15524.83,10545.09 ; 15512.76,10549.73 cw(c15513.79,10534.39) 15524.83,10545.09 ; 15512.76,10549.73 cw(c15513.79,10534.39) 15524.83,10545.09 ; 15512.76,10549.73 cw(c15513.79,10534.39) 15524.83,10545.09 ; 15512.76,10549.73 cw(c15513.79,10534.39) 15524.83,10545.09 ; 15512.76,10549.73 cw(c15513.79,10534.39) 15524.83,10545.09 ; 15512.76,10549.73 cw(c15513.79,10534.39) 15524.83,10545.09 ; 15512.76,10549.73 cw(c15513.79,10534.39) 15524.83,10545.09 ; 15512.76,10549.73 cw(c15513.79,10534.39) 15524.83,10545.09 ; 15512.76,10549.73 cw(c15513.79,10534.39) 15524.83,10545.09 ; 15512.76,10549.73 cw(c15513.79,10534.39) 15524.83,10545.09
  Bottom 6+gnd w5: v1@15411.19,9709.56 U4.11@15411.19,9771.4
DD7: IC2.63 U3.13 U4.13 | length 1246.9
  Top Layer 1 w5: v1@15348.2,10170.19 U3.13@15348.2,10232.03 ; IC2.63@15494.02,10461.87 v1@15494.02,10514.16
  Layer 3 w5: v1(15347.95,9709.31) 15347.95,9803 15363.81,9818.86 15363.81,10146.04 ; v1(15347.95,10169.94) cw(c15352.95,10169.94) 15348.77,10172.68 15362.5,10193.6 ; 15363.32,10196.3 15363.32,10379.18 ; v1(15493.79,10514.39) 15364.75,10382.68 ccw(c15368.33,10379.18) 15363.32,10379.18 ; v1(15347.95,10169.94) ccw(c15352.95,10169.94) v1@15348.98,10166.9 ; v1(15347.95,10169.94) ccw(c15352.95,10169.94) v1@15348.98,10166.9 ; v1(15347.95,10169.94) ccw(c15352.95,10169.94) v1@15348.98,10166.9 ; v1(15347.95,10169.94) ccw(c15352.95,10169.94) v1@15348.98,10166.9 ; v1(15347.95,10169.94) ccw(c15352.95,10169.94) v1@15348.99,10166.89 ; v1(15347.95,10169.94) ccw(c15352.95,10169.94) v1@15348.98,10166.9 ; v1(15347.95,10169.94) ccw(c15352.95,10169.94) v1@15348.98,10166.9 ; v1(15347.95,10169.94) ccw(c15352.95,10169.94) v1@15348.98,10166.9 ; v1(15347.95,10169.94) ccw(c15352.95,10169.94) v1@15348.98,10166.9 ; v1(15347.95,10169.94) ccw(c15352.95,10169.94) v1@15348.98,10166.9 ; v1(15347.95,10169.94) ccw(c15352.95,10169.94) v1@15348.98,10166.9 ; v1(15347.95,10169.94) ccw(c15352.95,10169.94) v1@15348.98,10166.9 ; v1(15347.95,10169.94) ccw(c15352.95,10169.94) v1@15348.98,10166.9 ; v1(15347.95,10169.94) ccw(c15352.95,10169.94) v1@15348.98,10166.9 ; v1(15347.95,10169.94) ccw(c15352.95,10169.94) v1@15348.98,10166.9 ; v1(15347.95,10169.94) ccw(c15352.95,10169.94) v1@15348.98,10166.9 ; v1@15348.99,10166.89 15362.77,10149.05 ; 15362.5,10193.6 ccw(c15358.32,10196.34) 15363.32,10196.25 ; 15362.51,10193.6 ccw(c15358.32,10196.34) 15363.32,10196.25 ; 15362.51,10193.6 ccw(c15358.32,10196.34) 15363.32,10196.25 ; 15362.51,10193.6 ccw(c15358.32,10196.34) 15363.32,10196.25 ; 15362.51,10193.6 ccw(c15358.32,10196.34) 15363.32,10196.25 ; 15362.51,10193.6 ccw(c15358.32,10196.34) 15363.32,10196.25 ; 15362.51,10193.6 ccw(c15358.32,10196.34) 15363.32,10196.25 ; 15362.51,10193.6 ccw(c15358.32,10196.34) 15363.32,10196.25 ; 15362.51,10193.6 ccw(c15358.32,10196.34) 15363.32,10196.25 ; 15362.51,10193.6 ccw(c15358.32,10196.34) 15363.32,10196.25 ; 15362.51,10193.6 ccw(c15358.32,10196.34) 15363.32,10196.25 ; 15362.51,10193.6 ccw(c15358.32,10196.34) 15363.32,10196.25 ; 15362.51,10193.6 ccw(c15358.32,10196.34) 15363.32,10196.25 ; 15362.51,10193.6 ccw(c15358.32,10196.34) 15363.32,10196.25 ; 15362.51,10193.6 ccw(c15358.32,10196.34) 15363.32,10196.25 ; 15362.51,10193.6 ccw(c15358.32,10196.34) 15363.32,10196.25 ; 15362.77,10149.05 cw(c15358.81,10146) 15363.81,10146.09 ; 15362.77,10149.05 cw(c15358.81,10146) 15363.81,10146.09 ; 15362.77,10149.05 cw(c15358.81,10146) 15363.81,10146.09 ; 15362.77,10149.05 cw(c15358.81,10146) 15363.81,10146.09 ; 15362.77,10149.05 cw(c15358.81,10146) 15363.81,10146.09 ; 15362.77,10149.05 cw(c15358.81,10146) 15363.81,10146.09 ; 15362.77,10149.05 cw(c15358.81,10146) 15363.81,10146.09 ; 15362.77,10149.05 cw(c15358.81,10146) 15363.81,10146.09 ; 15362.77,10149.05 cw(c15358.81,10146) 15363.81,10146.09 ; 15362.77,10149.05 cw(c15358.81,10146) 15363.81,10146.09 ; 15362.77,10149.05 cw(c15358.81,10146) 15363.81,10146.09 ; 15362.77,10149.05 cw(c15358.81,10146) 15363.81,10146.09 ; 15362.77,10149.05 cw(c15358.81,10146) 15363.81,10146.09 ; 15362.77,10149.05 cw(c15358.81,10146) 15363.81,10146.09 ; 15362.77,10149.05 cw(c15358.81,10146) 15363.81,10146.09 ; 15362.77,10149.05 cw(c15358.81,10146) 15363.81,10146.09 ; 15363.32,10379.18 cw(c15368.33,10379.18) 15364.74,10382.67 ; 15363.32,10379.18 cw(c15368.33,10379.18) 15364.74,10382.67 ; 15363.32,10379.18 cw(c15368.33,10379.18) 15364.75,10382.67 ; 15363.32,10379.18 cw(c15368.33,10379.18) 15364.74,10382.67 ; 15363.32,10379.18 cw(c15368.33,10379.18) 15364.74,10382.67 ; 15363.32,10379.18 cw(c15368.33,10379.18) 15364.74,10382.67 ; 15363.32,10379.18 cw(c15368.33,10379.18) 15364.74,10382.67 ; 15363.32,10379.18 cw(c15368.33,10379.18) 15364.74,10382.66 ; 15363.32,10379.18 cw(c15368.33,10379.18) 15364.74,10382.66 ; 15363.32,10379.18 cw(c15368.33,10379.18) 15364.74,10382.66 ; 15363.32,10379.18 cw(c15368.33,10379.18) 15364.74,10382.66 ; 15363.32,10379.18 cw(c15368.33,10379.18) 15364.74,10382.66 ; 15363.32,10379.18 cw(c15368.33,10379.18) 15364.74,10382.66 ; 15363.32,10379.18 cw(c15368.33,10379.18) 15364.74,10382.66 ; 15363.32,10379.18 cw(c15368.33,10379.18) 15364.74,10382.66
  Bottom 6+gnd w5: v1@15348.2,9709.56 U4.13@15348.2,9771.4
DD8: IC2.64 U3.42 U4.42 | length 1288.6
  Top Layer 1 w5: U3.42@15348.2,9771.4 v1@15348.2,9833.24 ; IC2.64@15513.87,10461.71 v1@15513.87,10534.31
  Layer 3 w5: v1(15348.44,9833.49) 15348.44,10145.64 ; 15348.44,10195.56 15348.44,10293.63 v1(15347.95,10294.12) 15347.95,10388.23 ; v1(15513.79,10534.39) 15490.57,10529.43 ; 15346.98,10149.12 cw(c15343.44,10145.59) 15348.44,10145.68 ; 15346.98,10149.12 cw(c15343.44,10145.59) 15348.44,10145.68 ; 15346.98,10149.12 cw(c15343.44,10145.59) 15348.44,10145.68 ; 15346.98,10149.12 cw(c15343.44,10145.59) 15348.44,10145.68 ; 15346.98,10149.12 cw(c15343.44,10145.59) 15348.44,10145.68 ; 15346.98,10149.12 cw(c15343.44,10145.59) 15348.44,10145.68 ; 15346.98,10149.12 cw(c15343.44,10145.59) 15348.44,10145.68 ; 15346.98,10149.12 cw(c15343.44,10145.59) 15348.44,10145.68 ; 15346.98,10149.12 cw(c15343.44,10145.59) 15348.44,10145.68 ; 15346.98,10149.12 cw(c15343.44,10145.59) 15348.44,10145.68 ; 15346.98,10149.12 cw(c15343.44,10145.59) 15348.44,10145.68 ; 15346.98,10149.12 cw(c15343.44,10145.59) 15348.44,10145.68 ; 15346.98,10149.12 cw(c15343.44,10145.59) 15348.44,10145.68 ; 15346.98,10149.12 cw(c15343.44,10145.59) 15348.44,10145.68 ; 15346.98,10149.12 cw(c15343.44,10145.59) 15348.44,10145.68 ; 15346.98,10149.12 cw(c15343.44,10145.59) 15348.44,10145.68 ; 15346.98,10149.12 15337.06,10159.1 cw(c15347.95,10169.94) 15336.43,10180.12 15347.19,10192.29 ; 15347.19,10192.29 ccw(c15343.44,10195.6) 15348.44,10195.51 ; 15347.19,10192.29 ccw(c15343.44,10195.6) 15348.44,10195.51 ; 15347.19,10192.29 ccw(c15343.44,10195.6) 15348.44,10195.51 ; 15347.19,10192.29 ccw(c15343.44,10195.6) 15348.44,10195.51 ; 15347.19,10192.29 ccw(c15343.44,10195.6) 15348.44,10195.51 ; 15347.19,10192.29 ccw(c15343.44,10195.6) 15348.44,10195.51 ; 15347.19,10192.29 ccw(c15343.44,10195.6) 15348.44,10195.51 ; 15347.19,10192.29 ccw(c15343.44,10195.6) 15348.44,10195.51 ; 15347.19,10192.29 ccw(c15343.44,10195.6) 15348.44,10195.51 ; 15347.19,10192.29 ccw(c15343.44,10195.6) 15348.44,10195.51 ; 15347.19,10192.29 ccw(c15343.44,10195.6) 15348.44,10195.51 ; 15347.19,10192.29 ccw(c15343.44,10195.6) 15348.44,10195.51 ; 15347.19,10192.29 ccw(c15343.44,10195.6) 15348.44,10195.51 ; 15347.19,10192.29 ccw(c15343.44,10195.6) 15348.44,10195.51 ; 15347.19,10192.29 ccw(c15343.44,10195.6) 15348.44,10195.51 ; 15347.19,10192.29 ccw(c15343.44,10195.6) 15348.44,10195.51 ; 15347.95,10388.23 cw(c15352.95,10388.23) 15349.4,10391.74 ; 15347.95,10388.23 cw(c15352.95,10388.23) 15349.4,10391.74 ; 15347.95,10388.23 cw(c15352.95,10388.23) 15349.4,10391.74 ; 15347.95,10388.23 cw(c15352.95,10388.23) 15349.4,10391.74 ; 15347.95,10388.23 cw(c15352.95,10388.23) 15349.4,10391.74 ; 15347.95,10388.23 cw(c15352.95,10388.23) 15349.4,10391.74 ; 15347.95,10388.23 cw(c15352.95,10388.23) 15349.4,10391.74 ; 15347.95,10388.23 cw(c15352.95,10388.23) 15349.4,10391.74 ; 15347.95,10388.23 cw(c15352.95,10388.23) 15349.4,10391.74 ; 15347.95,10388.23 cw(c15352.95,10388.23) 15349.4,10391.74 ; 15347.95,10388.23 cw(c15352.95,10388.23) 15349.4,10391.74 ; 15347.95,10388.23 cw(c15352.95,10388.23) 15349.4,10391.74 ; 15347.95,10388.23 cw(c15352.95,10388.23) 15349.4,10391.74 ; 15347.95,10388.23 cw(c15352.95,10388.23) 15349.4,10391.74 ; 15347.95,10388.23 cw(c15352.95,10388.23) 15349.4,10391.74 ; 15347.95,10388.23 cw(c15352.95,10388.23) 15349.4,10391.74 ; 15349.4,10391.74 15482.93,10525.28 ; 15482.93,10525.28 cw(c15493.79,10514.39) 15490.57,10529.43 ; 15482.93,10525.28 cw(c15493.79,10514.39) 15490.57,10529.43 ; 15482.93,10525.28 cw(c15493.79,10514.39) 15490.57,10529.43 ; 15482.93,10525.28 cw(c15493.79,10514.39) 15490.57,10529.43 ; 15482.93,10525.28 cw(c15493.79,10514.39) 15490.57,10529.43 ; 15482.93,10525.28 cw(c15493.79,10514.39) 15490.57,10529.43 ; 15482.93,10525.28 cw(c15493.79,10514.39) 15490.57,10529.43 ; 15482.93,10525.28 cw(c15493.79,10514.39) 15490.57,10529.43 ; 15482.93,10525.28 cw(c15493.79,10514.39) 15490.57,10529.43 ; 15482.93,10525.28 cw(c15493.79,10514.39) 15490.57,10529.43 ; 15482.93,10525.28 cw(c15493.79,10514.39) 15490.57,10529.43 ; 15482.93,10525.28 cw(c15493.79,10514.39) 15490.57,10529.43 ; 15482.93,10525.28 cw(c15493.79,10514.39) 15490.57,10529.43 ; 15482.93,10525.28 cw(c15493.79,10514.39) 15490.57,10529.43 ; 15482.93,10525.28 cw(c15493.79,10514.39) 15490.57,10529.43 ; 15482.93,10525.28 cw(c15493.79,10514.39) 15490.57,10529.43
  Bottom 6+gnd w5: U4.42@15348.2,10232.03 v1@15348.2,10293.87
DD9: IC2.65 U3.44 U4.44 | length 1096.9
  Top Layer 1 w5: U3.44@15411.19,9771.4 v1@15411.19,9833.24 ; IC2.65@15533.39,10461.87 v1@15533.39,10514.16
  Layer 3 w5: v1(15411.43,9833.49) 15411.43,10145.64 ; 15411.43,10195.56 15411.43,10293.63 v1(15410.94,10294.12) 15410.94,10404.3 ; v1(15533.16,10514.39) 15412.63,10408.04 ; 15409.98,10149.12 cw(c15406.43,10145.59) 15411.43,10145.68 ; 15409.98,10149.12 cw(c15406.43,10145.59) 15411.43,10145.68 ; 15409.98,10149.12 cw(c15406.43,10145.59) 15411.43,10145.68 ; 15409.98,10149.12 cw(c15406.43,10145.59) 15411.43,10145.68 ; 15409.98,10149.12 cw(c15406.43,10145.59) 15411.43,10145.68 ; 15409.98,10149.12 cw(c15406.43,10145.59) 15411.43,10145.68 ; 15409.98,10149.12 cw(c15406.43,10145.59) 15411.43,10145.68 ; 15409.98,10149.12 cw(c15406.43,10145.59) 15411.43,10145.68 ; 15409.98,10149.12 cw(c15406.43,10145.59) 15411.43,10145.68 ; 15409.98,10149.12 cw(c15406.43,10145.59) 15411.43,10145.68 ; 15409.98,10149.12 cw(c15406.43,10145.59) 15411.43,10145.68 ; 15409.98,10149.12 cw(c15406.43,10145.59) 15411.43,10145.68 ; 15409.98,10149.12 cw(c15406.43,10145.59) 15411.43,10145.68 ; 15409.98,10149.12 cw(c15406.43,10145.59) 15411.43,10145.68 ; 15409.98,10149.12 cw(c15406.43,10145.59) 15411.43,10145.68 ; 15409.98,10149.12 cw(c15406.43,10145.59) 15411.43,10145.68 ; 15409.98,10149.12 15400.05,10159.1 cw(c15410.94,10169.94) 15399.42,10180.12 15410.18,10192.29 ; 15410.18,10192.29 ccw(c15406.43,10195.6) 15411.43,10195.51 ; 15410.18,10192.29 ccw(c15406.43,10195.6) 15411.43,10195.51 ; 15410.18,10192.29 ccw(c15406.43,10195.6) 15411.43,10195.51 ; 15410.18,10192.29 ccw(c15406.43,10195.6) 15411.43,10195.51 ; 15410.18,10192.29 ccw(c15406.43,10195.6) 15411.43,10195.51 ; 15410.18,10192.29 ccw(c15406.43,10195.6) 15411.43,10195.51 ; 15410.18,10192.29 ccw(c15406.43,10195.6) 15411.43,10195.51 ; 15410.18,10192.29 ccw(c15406.43,10195.6) 15411.43,10195.51 ; 15410.18,10192.29 ccw(c15406.43,10195.6) 15411.43,10195.51 ; 15410.18,10192.29 ccw(c15406.43,10195.6) 15411.43,10195.51 ; 15410.18,10192.29 ccw(c15406.43,10195.6) 15411.43,10195.51 ; 15410.18,10192.29 ccw(c15406.43,10195.6) 15411.43,10195.51 ; 15410.18,10192.29 ccw(c15406.43,10195.6) 15411.43,10195.51 ; 15410.18,10192.29 ccw(c15406.43,10195.6) 15411.43,10195.51 ; 15410.18,10192.29 ccw(c15406.43,10195.6) 15411.43,10195.51 ; 15410.18,10192.29 ccw(c15406.43,10195.6) 15411.43,10195.51 ; 15410.94,10404.3 cw(c15415.94,10404.3) 15412.63,10408.05 ; 15410.94,10404.3 cw(c15415.94,10404.3) 15412.63,10408.05 ; 15410.94,10404.3 cw(c15415.94,10404.3) 15412.63,10408.05 ; 15410.94,10404.3 cw(c15415.94,10404.3) 15412.63,10408.05 ; 15410.94,10404.3 cw(c15415.94,10404.3) 15412.63,10408.05 ; 15410.94,10404.3 cw(c15415.94,10404.3) 15412.63,10408.05 ; 15410.94,10404.3 cw(c15415.94,10404.3) 15412.63,10408.05 ; 15410.94,10404.3 cw(c15415.94,10404.3) 15412.63,10408.05 ; 15410.94,10404.3 cw(c15415.94,10404.3) 15412.63,10408.05 ; 15410.94,10404.3 cw(c15415.94,10404.3) 15412.63,10408.05 ; 15410.94,10404.3 cw(c15415.94,10404.3) 15412.63,10408.05 ; 15410.94,10404.3 cw(c15415.94,10404.3) 15412.63,10408.05 ; 15410.94,10404.3 cw(c15415.94,10404.3) 15412.63,10408.05 ; 15410.94,10404.3 cw(c15415.94,10404.3) 15412.63,10408.05 ; 15410.94,10404.3 cw(c15415.94,10404.3) 15412.63,10408.05 ; 15410.94,10404.3 cw(c15415.94,10404.3) 15412.63,10408.05
  Bottom 6+gnd w5: U4.44@15411.19,10232.03 v1@15411.19,10293.87
DD10: IC2.66 U3.45 U4.45 | length 910.2
  Top Layer 1 w5: U3.45@15442.68,9771.4 v1@15442.68,9833.24 ; v1(15552.06,10406.33) 15552.97,10407.25 IC2.66@15552.97,10461.96
  Layer 3 w5: 15430.83,10180.02 ccw(c15442.44,10169.94) 15431.54,10159.1 15441.47,10149.12 ; 15430.84,10180.03 15440.47,10191.09 ccw(c15436.7,10194.37) 15441.7,10194.28 ; 15441.7,10194.33 v1(15441.7,10294.63) 15441.7,10347.56 ; v1(15442.93,9833.49) 15442.93,10145.64 ; v1(15552.06,10406.33) 15525.15,10399.14 ccw(c15531.7,10374.63) 15519.03,10396.62 15494.19,10382.3 ccw(c15506.85,10360.32) 15493.66,10381.99 15444.1,10351.83 ; 15441.47,10149.12 cw(c15437.93,10145.59) 15442.93,10145.68 ; 15441.47,10149.12 cw(c15437.93,10145.59) 15442.93,10145.68 ; 15441.47,10149.12 cw(c15437.93,10145.59) 15442.93,10145.68 ; 15441.47,10149.12 cw(c15437.93,10145.59) 15442.93,10145.68 ; 15441.47,10149.12 cw(c15437.93,10145.59) 15442.93,10145.68 ; 15441.47,10149.12 cw(c15437.93,10145.59) 15442.93,10145.68 ; 15441.47,10149.12 cw(c15437.93,10145.59) 15442.93,10145.68 ; 15441.47,10149.12 cw(c15437.93,10145.59) 15442.93,10145.68 ; 15441.47,10149.12 cw(c15437.93,10145.59) 15442.93,10145.68 ; 15441.47,10149.12 cw(c15437.93,10145.59) 15442.93,10145.68 ; 15441.47,10149.12 cw(c15437.93,10145.59) 15442.93,10145.68 ; 15441.47,10149.12 cw(c15437.93,10145.59) 15442.93,10145.68 ; 15441.47,10149.12 cw(c15437.93,10145.59) 15442.93,10145.68 ; 15441.47,10149.12 cw(c15437.93,10145.59) 15442.93,10145.68 ; 15441.47,10149.12 cw(c15437.93,10145.59) 15442.93,10145.68 ; 15441.47,10149.12 cw(c15437.93,10145.59) 15442.93,10145.68 ; 15441.7,10347.56 cw(c15446.7,10347.56) 15444.1,10351.83 ; 15441.7,10347.56 cw(c15446.7,10347.56) 15444.1,10351.83 ; 15441.7,10347.56 cw(c15446.7,10347.56) 15444.1,10351.83 ; 15441.7,10347.56 cw(c15446.7,10347.56) 15444.1,10351.83 ; 15441.7,10347.56 cw(c15446.7,10347.56) 15444.1,10351.83
  Bottom 6+gnd w5: v1(15441.7,10294.63) 15441.7,10233.01 U4.45@15442.68,10232.03